# Allegro board io_4di_4aic_dbdoctor_2.brd
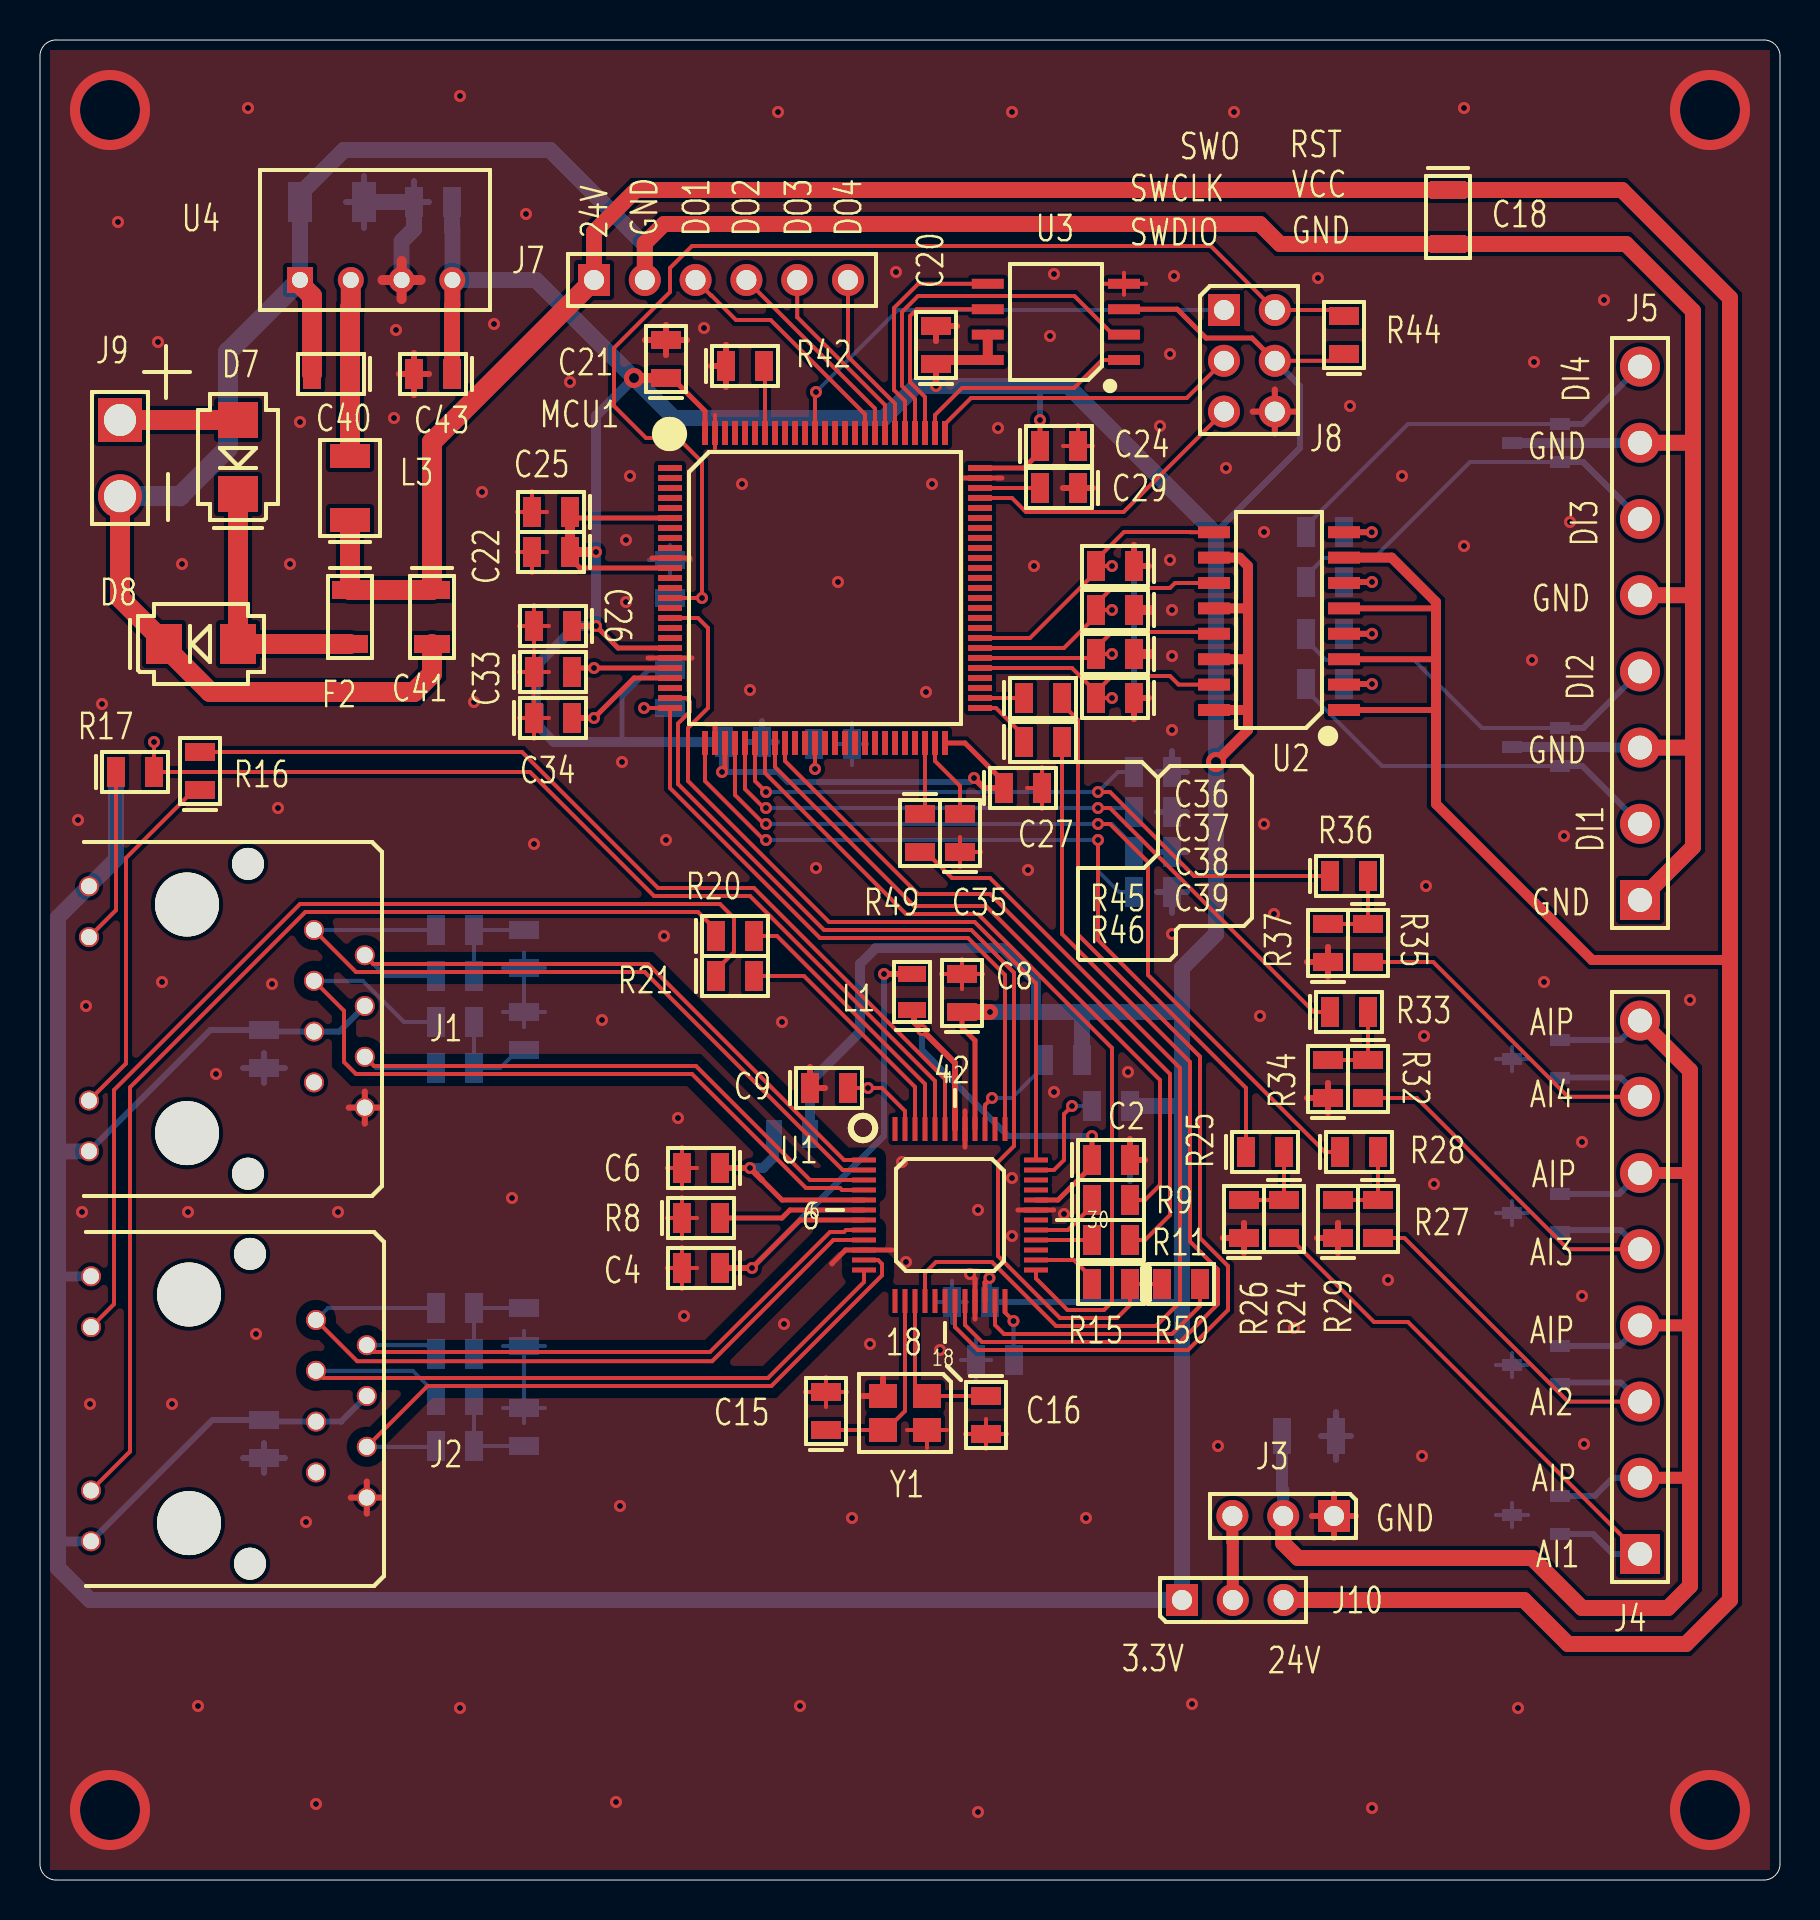
[diagram p0: board, top side]
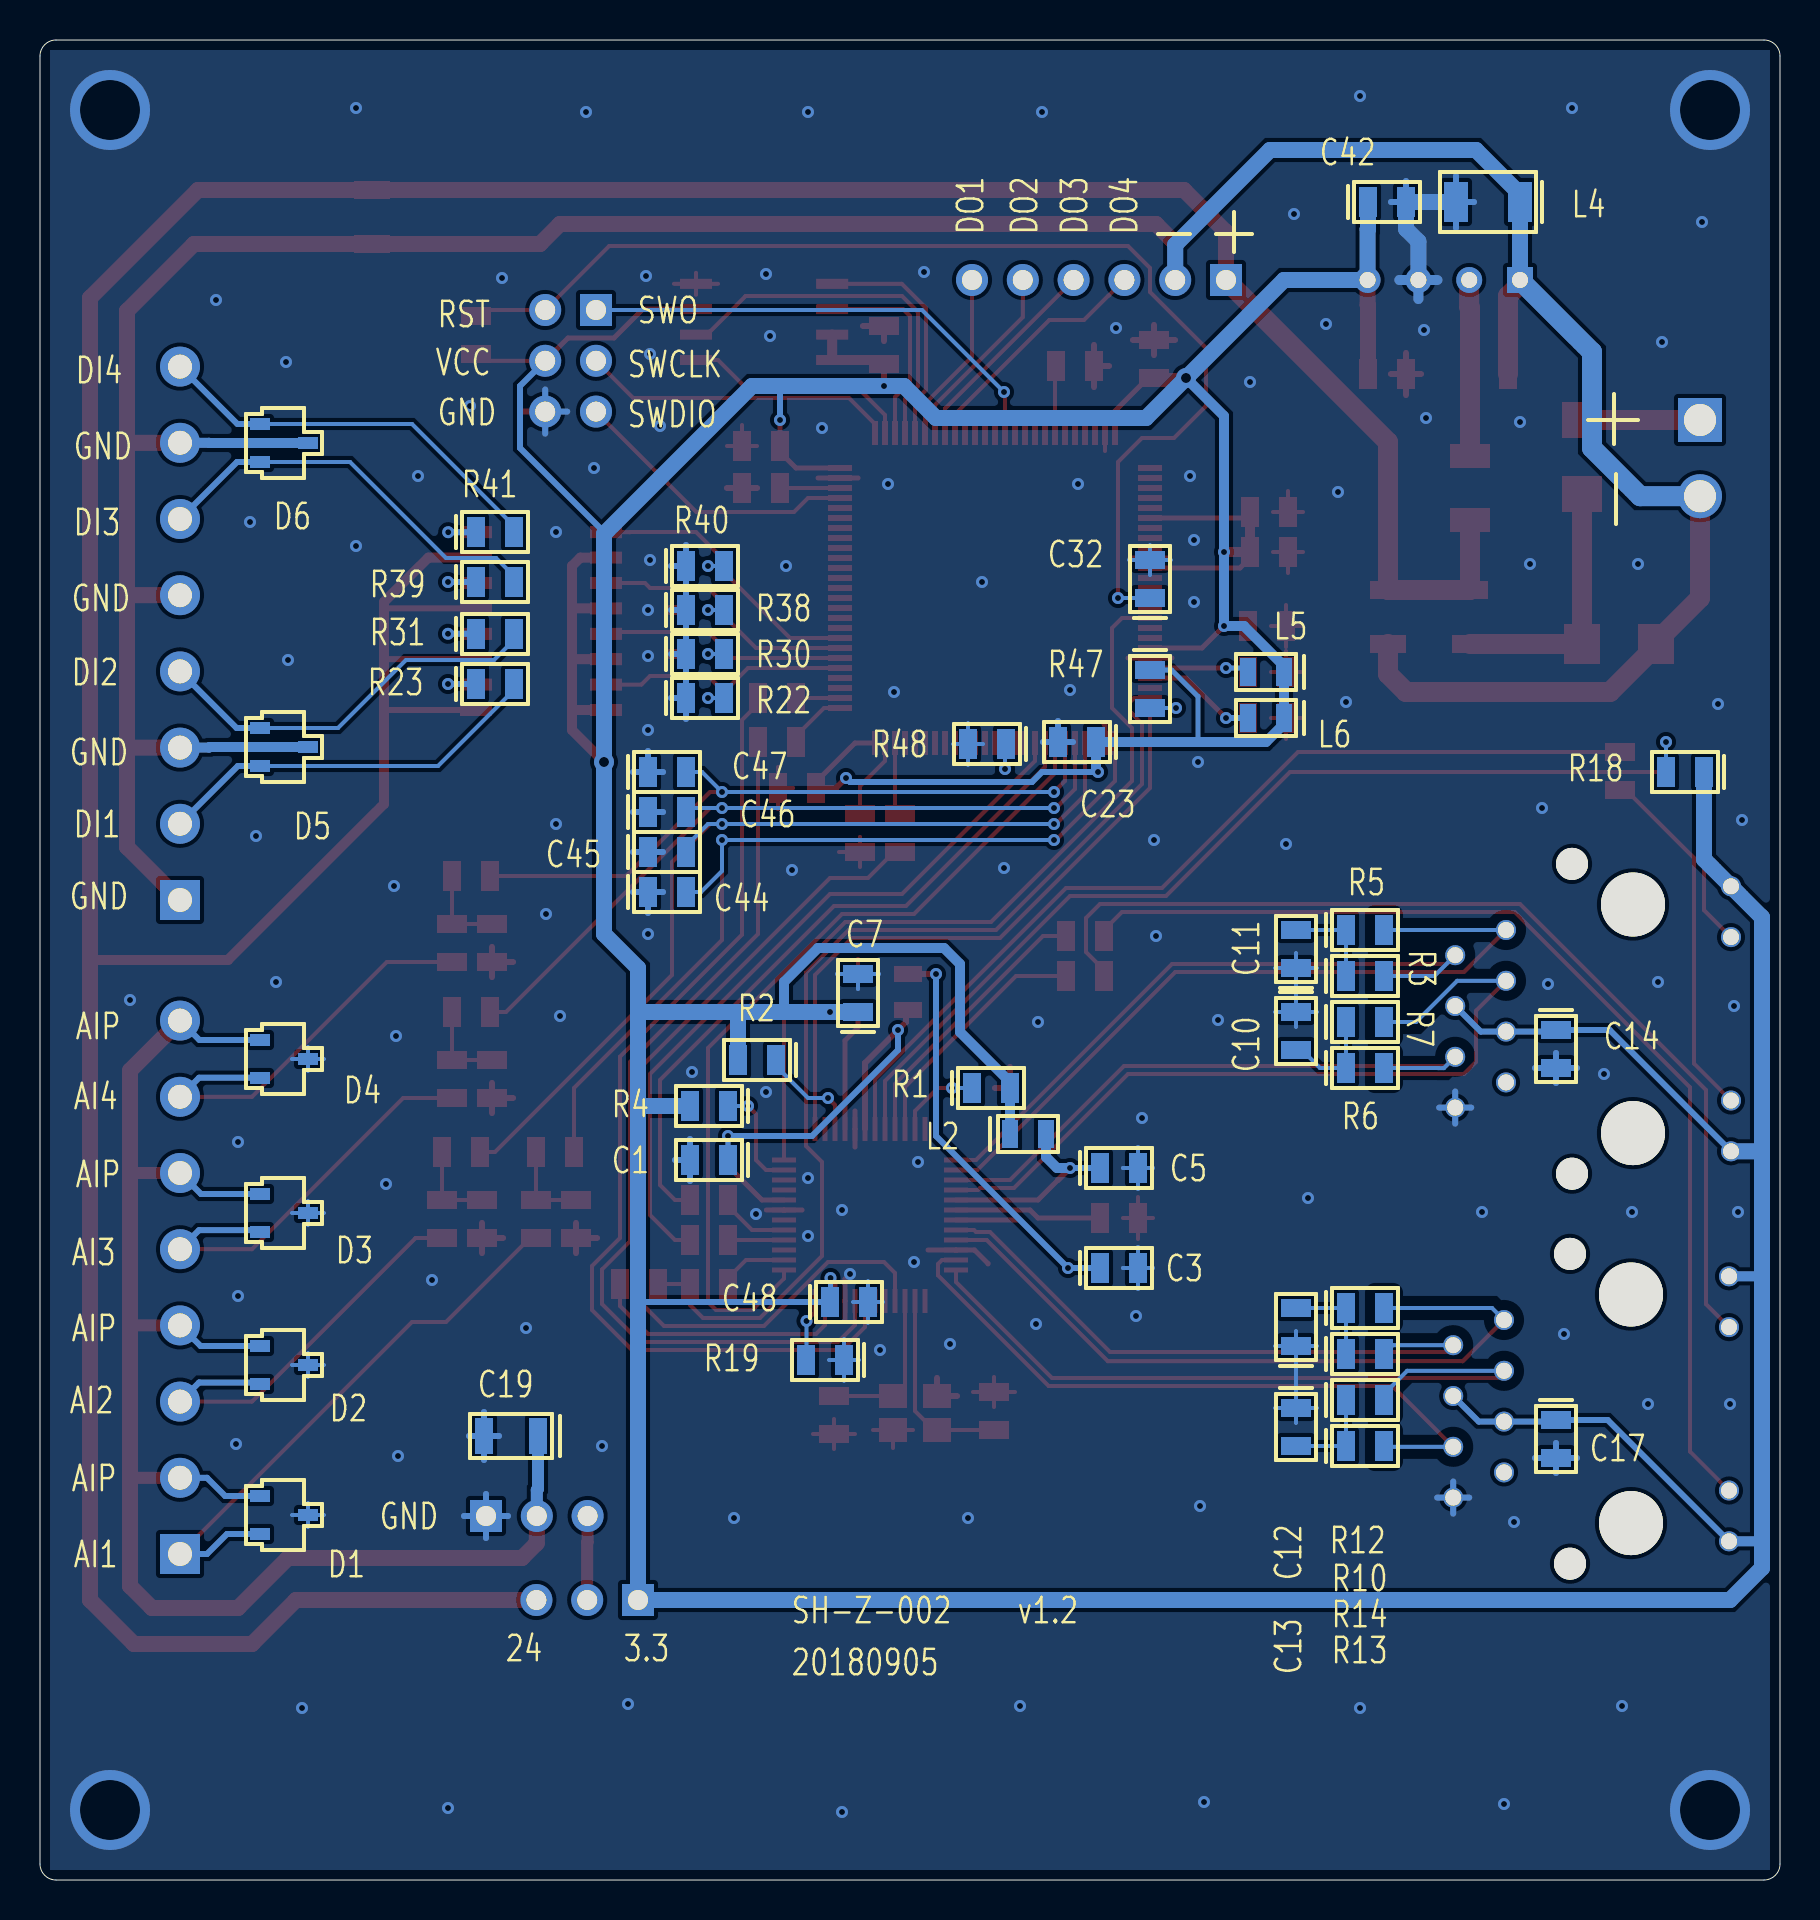
[diagram p1: board, bottom side, seen from below]

Outline 87 x 92 mm; copper layers: TOP, BOTTOM. Coordinates in mm from the lower left corner of the outline.
Outline path: 0,91.2 0,0.8 arc(0.23,0.23) 0.8,0 86.2,0 arc(86.77,0.23) 87,0.8 87,91.2 arc(86.77,91.77) 86.2,92 0.8,92 arc(0.23,91.77) 0,91.2

## Design rules (mm)
constraint set DEFAULT: pair gap 0.2
net group DP_RX1: nets RXM1 RXP1
net group DP_RX2: nets RXM2 RXP2
net group DP_TX1: nets TXM1 TXP1
net group DP_TX2: nets TXM2 TXP2

## Placement (name value [footprint] x y rotation side)
C1  47uF  [SMD_C_0805]  52.6 36 270 bottom
C2  100nF  [SMD_C_0805]  52.6 36 90 top
C3  47uF  [SMD_C_0805]  34 30.6 90 bottom
C4  100nF  [SMD_C_0805]  34 30.6 270 top
C5  47uF  [SMD_C_0805]  34 35.6 90 bottom
C6  100nF  [SMD_C_0805]  34 35.6 270 top
C7  47uF  [SMD_C_0805]  46.1 43.4 0 bottom
C8  100nF  [SMD_C_0805]  46.1 43.4 180 top
C9  100nF  [SMD_C_0805]  38.5 39.6 90 top
C10  100nF  [SMD_C_0805]  24.2 45.6 0 bottom
C11  100nF  [SMD_C_0805]  24.2 43.4 180 bottom
C12  100nF  [SMD_C_0805]  24.2 26.7 0 bottom
C13  100nF  [SMD_C_0805]  24.2 23.6 180 bottom
C14  100nF  [SMD_C_0805]  11.2 42.5 180 bottom
C15  18pF  [SMD_C_0805]  39.3 22.5 180 top
C16  18pF  [SMD_C_0805]  47.3 24.2 0 top
C17  100nF  [SMD_C_0805]  11.2 23 180 bottom
C18  10uF/50V  [SMD_C_1206]  70.4 84.5 0 top
C19  10uF/50V  [SMD_C_1206]  62.1 22.2 270 bottom
C20  100nF  [SMD_C_0805]  44.8 75.8 180 top
C21  100nF  [SMD_C_0805]  31.3 75.1 180 top
C22  100nF  [SMD_C_0805]  26.5 66.4 270 top
C23  100nF  [SMD_C_0805]  34.2 56.9 270 bottom
C24  100nF  [SMD_C_0805]  50 71.7 90 top
C25  100nF  [SMD_C_0805]  26.5 68.4 270 top
C26  100nF  [SMD_C_0805]  26.6 62.7 270 top
C27  100nF  [SMD_C_0805]  48.2 54.6 90 top
C29  10uF  [SMD_C_0805]  51.9 69.6 270 top
C32  100nF  [SMD_C_0805]  31.5 64.1 0 bottom
C33  100nF  [SMD_C_0805]  24.7 60.4 90 top
C34  100nF  [SMD_C_0805]  24.7 58.1 90 top
C35  10uF  [SMD_C_0805]  46 51.4 180 top
C36  100nF  [SMD_C_0805]  54.7 65.7 270 top
C37  100nF  [SMD_C_0805]  54.7 63.5 270 top
C38  100nF  [SMD_C_0805]  54.7 61.3 270 top
C39  100nF  [SMD_C_0805]  54.7 59.1 270 top
C40  100nF/50V  [SMD_C_0805]  15.5 75.3 270 top
C41  10uF/50V  [SMD_C_1206]  19.6 64.5 0 top
C42  47uF  [SMD_C_0805]  20.6 83.9 90 bottom
C43  47uF  [SMD_C_0805]  20.6 75.3 270 top
C44  100nF  [SMD_C_0805]  56.6 49.4 90 bottom
C45  100nF  [SMD_C_0805]  56.6 51.4 90 bottom
C46  100nF  [SMD_C_0805]  56.6 53.4 90 bottom
C47  100nF  [SMD_C_0805]  56.6 55.4 90 bottom
C48  100nF  [SMD_C_0805]  47.5 28.9 90 bottom
D1  PESD5V0L2BT  [SOT23_D]  75.9 19.2 270 bottom
D2  PESD5V0L2BT  [SOT23_D]  75.9 26.7 270 bottom
D3  PESD5V0L2BT  [SOT23_D]  75.9 34.3 270 bottom
D4  PESD5V0L2BT  [SOT23_D]  75.9 42 270 bottom
D5  NUP2105LT1G  [SOT23_D]  75.9 57.6 270 bottom
D6  NUP2105LT1G  [SOT23_D]  75.9 72.8 270 bottom
D7  1N5822  [SMAF]  9.9 69.3 180 top
D8  SMAJ24CA  [DO-214AC]  6.2 61.8 90 top
F2  500mA  [SMD_R_1206]  15.5 64.5 0 top
J1  ETH1  [RJ45_HR911105A]  13.7 47.5 90 top
J2  ETH2  [RJ45_HR911105A]  13.8 28 90 top
J3  AI_PWR_Select  [C1X3]  64.7 18.2 270 top
J4  4~20mA  [C1X8_P381]  80 16.3 180 top
J5  DI  [C1X8_P381]  80 49 180 top
J7  Relay  [C1X6]  27.7 80 90 top
J8  SWD  [C2X3]  59.2 78.5 0 top
J9  PWR  [C1X2_P381]  4 73 0 top
J10  AI_PWR_Select  [C1X3]  57.1 14 90 top
L1  bead  [SMD_L_0805]  43.6 43.5 180 top
L2  bead  [SMD_L_0805]  38.5 37.3 90 bottom
L3  6.8uH  [SMD_L_1210]  15.5 68 180 top
L4  None  [SMD_L_1210]  13 83.9 270 bottom
L5  bead  [SMD_L_0805]  24.8 60.4 270 bottom
L6  bead  [SMD_L_0805]  24.8 58.1 270 bottom
MCU1  STM32F407VET6  [LQFP100]  39.25 64.6 0 top
R1  10K  [SMD_R_0805]  40.4 39.6 90 bottom
R2  1K  [SMD_R_0805]  50.2 41 270 bottom
R3  51R  [SMD_R_0805]  21.7 45.2 90 bottom
R4  4.7K  [SMD_R_0805]  52.6 38.7 270 bottom
R5  51R  [SMD_R_0805]  21.7 47.5 90 bottom
R6  51R  [SMD_R_0805]  21.7 40.6 90 bottom
R7  51R  [SMD_R_0805]  21.7 42.9 90 bottom
R8  11.8K/1%  [SMD_R_0805]  32.1 33.1 90 top
R9  22R  [SMD_R_0805]  52.6 34 90 top
R10  51R  [SMD_R_0805]  21.7 26.3 90 bottom
R11  22R  [SMD_R_0805]  52.6 32 90 top
R12  51R  [SMD_R_0805]  21.7 28.6 90 bottom
R13  51R  [SMD_R_0805]  21.7 21.7 90 bottom
R14  51R  [SMD_R_0805]  21.7 24 90 bottom
R15  22R  [SMD_R_0805]  54.5 29.8 270 top
R16  220R  [SMD_R_0805]  8 54.5 180 top
R17  220R  [SMD_R_0805]  3.8 55.4 90 top
R18  4.7K  [SMD_R_0805]  3.8 55.4 270 bottom
R19  1K  [SMD_R_0805]  46.8 26 270 bottom
R20  220R  [SMD_R_0805]  33.8 47.2 90 top
R21  220R  [SMD_R_0805]  33.8 45.2 90 top
R22  2K  [SMD_R_0805]  54.7 59.1 90 bottom
R23  1K  [SMD_R_0805]  65.2 59.8 90 bottom
R24  51R  [SMD_R_0805]  62.2 34 0 top
R25  2K  [SMD_R_0805]  60.3 36.4 90 top
R26  100R  [SMD_R_0805]  60.2 32.1 180 top
R27  51R  [SMD_R_0805]  66.9 34 0 top
R28  2K  [SMD_R_0805]  65 36.4 90 top
R29  100R  [SMD_R_0805]  64.9 32.1 180 top
R30  2K  [SMD_R_0805]  54.7 61.3 90 bottom
R31  1K  [SMD_R_0805]  65.2 62.3 90 bottom
R32  51R  [SMD_R_0805]  66.4 41 0 top
R33  2K  [SMD_R_0805]  64.5 43.4 90 top
R34  100R  [SMD_R_0805]  64.4 39.1 180 top
R35  51R  [SMD_R_0805]  66.4 47.8 0 top
R36  2K  [SMD_R_0805]  64.5 50.2 90 top
R37  100R  [SMD_R_0805]  64.4 45.9 180 top
R38  2K  [SMD_R_0805]  54.7 63.5 90 bottom
R39  1K  [SMD_R_0805]  65.2 64.9 90 bottom
R40  2K  [SMD_R_0805]  54.7 65.7 90 bottom
R41  1K  [SMD_R_0805]  65.2 67.4 90 bottom
R42  10K  [SMD_R_0805]  34.3 75.7 90 top
R44  10K  [SMD_R_0805]  65.2 76.3 180 top
R45  22R  [SMD_R_0805]  49.2 59.1 90 top
R46  22R  [SMD_R_0805]  49.2 56.9 90 top
R47  1.5K  [SMD_R_0805]  31.5 60.5 180 bottom
R48  10K  [SMD_R_0805]  38.7 56.8 270 bottom
R49  22R  [SMD_R_0805]  44 53.3 0 top
R50  22R  [SMD_R_0805]  56.1 29.8 90 top
U1  KSZ8863RLL  [LQFP48]  45.5 33.25 0 top
U2  PS2801-4/SM  [SOP16]  65.2 58.5 180 top
U3  W25Q64  [SOIC8_208MIL]  53.8 76 180 top
U4  B2403  [B2403S]  13 80 0 top
Y1  25M  [SMD3225_CRYSTAL]  44.35 24.2 180 top

## Library data of the parts
C1-C27 C29 C32-C48 = CAP NP
D1-D6 = SM712
D7 = DIODE
D8 = DIODE BI-DIR TRIG
F2 = FUSE
J1 J2 = RJ45_HR911105A
J3 J10 = C1X3
J4 J5 = C1X8Gen
J7 = C1X6Gen
J8 = C2X3
J9 = C1X2
L1-L6 = INDUCTOR
MCU1 = STM32F407VET
R1-R42 R44-R50 = RESISTOR
U1 = KSZ8863RLL
U2 = PS2801-4/SM
U3 = GD25Q64C
U4 = B2403S
Y1 = crystal-4pin_1

## Footprints (pads in the part's own frame, mm; a bottom-side part is the same pattern mirrored in y, then rotated)
B2403S
  rect 1.3x1.3 hole 0.8: 1(0,0)
  round 1.3 hole 0.8: 2(2.54,0) 3(5.08,0) 4(7.62,0)
C1X2_P381
  rect 2.2x2.2 hole 1.6: 1(0,0)
  round 2.2 hole 1.6: 2(0,-3.81)
C1X3
  rect 1.6x1.6 hole 1: 1(0,0)
  round 1.6 hole 1: 2(0,-2.54) 3(0,-5.08)
C1X6
  rect 1.6x1.6 hole 1: 1(0,0)
  round 1.6 hole 1: 2(0,-2.54) 3(0,-5.08) 4(0,-7.62) 5(0,-10.16) 6(0,-12.7)
C1X8_P381
  rect 2x2 hole 1.2: 1(0,0)
  round 2 hole 1.2: 2(0,-3.81) 3(0,-7.62) 4(0,-11.43) 5(0,-15.24) 6(0,-19.05) 7(0,-22.86) 8(0,-26.67)
C2X3
  rect 1.6x1.6 hole 1: 1(0,0)
  round 1.6 hole 1: 2(0,-2.54) 3(0,-5.08) 4(2.54,-5.08) 5(2.54,-2.54) 6(2.54,0)
DO-214AC
  rect 2x1.8 smd: 1(0,0) 2(0,-3.7)
LQFP48
  rect 1.2x0.25 smd: 1(-4.3,2.75) 2(-4.3,2.25) 3(-4.3,1.75) 4(-4.3,1.25) 5(-4.3,0.75) 6(-4.3,0.25) 7(-4.3,-0.25) 8(-4.3,-0.75) 9(-4.3,-1.25) 10(-4.3,-1.75) 11(-4.3,-2.25) 12(-4.3,-2.75) 25(4.3,-2.75) 26(4.3,-2.25) 27(4.3,-1.75) 28(4.3,-1.25) 29(4.3,-0.75) 30(4.3,-0.25) 31(4.3,0.25) 32(4.3,0.75) 33(4.3,1.25) 34(4.3,1.75) 35(4.3,2.25) 36(4.3,2.75)
  rect 0.25x1.2 smd: 13(-2.75,-4.3) 14(-2.25,-4.3) 15(-1.75,-4.3) 16(-1.25,-4.3) 17(-0.75,-4.3) 18(-0.25,-4.3) 19(0.25,-4.3) 20(0.75,-4.3) 21(1.25,-4.3) 22(1.75,-4.3) 23(2.25,-4.3) 24(2.75,-4.3) 37(2.75,4.3) 38(2.25,4.3) 39(1.75,4.3) 40(1.25,4.3) 41(0.75,4.3) 42(0.25,4.3) 43(-0.25,4.3) 44(-0.75,4.3) 45(-1.25,4.3) 46(-1.75,4.3) 47(-2.25,4.3) 48(-2.75,4.3)
LQFP100
  rect 1.2x0.3 smd: 1(-7.75,6) 2(-7.75,5.5) 3(-7.75,5) 4(-7.75,4.5) 5(-7.75,4) 6(-7.75,3.5) 7(-7.75,3) 8(-7.75,2.5) 9(-7.75,2) 10(-7.75,1.5) 11(-7.75,1) 12(-7.75,0.5) 13(-7.75,0) 14(-7.75,-0.5) 15(-7.75,-1) 16(-7.75,-1.5) 17(-7.75,-2) 18(-7.75,-2.5) 19(-7.75,-3) 20(-7.75,-3.5) 21(-7.75,-4) 22(-7.75,-4.5) 23(-7.75,-5) 24(-7.75,-5.5) 25(-7.75,-6) 51(7.75,-6) 52(7.75,-5.5) 53(7.75,-5) 54(7.75,-4.5) 55(7.75,-4) 56(7.75,-3.5) 57(7.75,-3) 58(7.75,-2.5) 59(7.75,-2) 60(7.75,-1.5) 61(7.75,-1) 62(7.75,-0.5) 63(7.75,0) 64(7.75,0.5) 65(7.75,1) 66(7.75,1.5) 67(7.75,2) 68(7.75,2.5) 69(7.75,3) 70(7.75,3.5) 71(7.75,4) 72(7.75,4.5) 73(7.75,5) 74(7.75,5.5) 75(7.75,6)
  rect 0.3x1.2 smd: 26(-6,-7.75) 27(-5.5,-7.75) 28(-5,-7.75) 29(-4.5,-7.75) 30(-4,-7.75) 31(-3.5,-7.75) 32(-3,-7.75) 33(-2.5,-7.75) 34(-2,-7.75) 35(-1.5,-7.75) 36(-1,-7.75) 37(-0.5,-7.75) 38(0,-7.75) 39(0.5,-7.75) 40(1,-7.75) 41(1.5,-7.75) 42(2,-7.75) 43(2.5,-7.75) 44(3,-7.75) 45(3.5,-7.75) 46(4,-7.75) 47(4.5,-7.75) 48(5,-7.75) 49(5.5,-7.75) 50(6,-7.75) 76(6,7.75) 77(5.5,7.75) 78(5,7.75) 79(4.5,7.75) 80(4,7.75) 81(3.5,7.75) 82(3,7.75) 83(2.5,7.75) 84(2,7.75) 85(1.5,7.75) 86(1,7.75) 87(0.5,7.75) 88(0,7.75) 89(-0.5,7.75) 90(-1,7.75) 91(-1.5,7.75) 92(-2,7.75) 93(-2.5,7.75) 94(-3,7.75) 95(-3.5,7.75) 96(-4,7.75) 97(-4.5,7.75) 98(-5,7.75) 99(-5.5,7.75) 100(-6,7.75)
RJ45_HR911105A
  round 1.6 hole 1.6 unplated: (-12.185,3.3) (3.305,3.3)
  round 3.2 hole 3.2 unplated: (-10.155,6.35) (1.275,6.35)
  round 1 hole 0.8: 1(0,0) 2(-1.26,-2.54) 3(-2.54,0) 4(-3.8,-2.54) 5(-5.08,0) 6(-6.34,-2.54) 7(-7.62,0) 8(-8.88,-2.54) 9(2.185,11.25) 10(-0.355,11.25) 11(-8.525,11.25) 12(-11.065,11.25)
SMAF
  rect 2x1.8 smd: 1(0,0) 2(0,-3.7)
SMD3225_CRYSTAL
  rect 1.4x1.2 smd: 1(0,0) 2(2.2,0) 3(2.2,1.7) 4(0,1.7)
SMD_C_0805
  rect 1.5x0.9 smd: 1(0,0) 2(0,-1.9)
SMD_C_1206
  rect 1.8x0.9 smd: 1(0,0) 2(0,-2.7)
SMD_L_0805
  rect 1.4x0.8 smd: 1(0,0) 2(0,-1.8)
SMD_L_1210
  rect 2x1.2 smd: 1(0,0) 2(0,-3.2)
SMD_R_0805
  rect 1.5x0.9 smd: 1(0,0) 2(0,-1.9)
SMD_R_1206
  rect 1.8x0.9 smd: 1(0,0) 2(0,-2.7)
SOIC8_208MIL
  rect 1.6x0.5 smd: 1(-0.4,0) 2(-0.4,-1.27) 3(-0.4,-2.54) 4(-0.4,-3.81) 5(6.41,-3.81) 6(6.41,-2.54) 7(6.41,-1.27) 8(6.41,0)
SOP16
  rect 1.6x0.6 smd: 1(0,0) 2(0,-1.27) 3(0,-2.54) 4(0,-3.81) 5(0,-5.08) 6(0,-6.35) 7(0,-7.62) 8(0,-8.89) 9(6.5,-8.89) 10(6.5,-7.62) 11(6.5,-6.35) 12(6.5,-5.08) 13(6.5,-3.81) 14(6.5,-2.54) 15(6.5,-1.27) 16(6.5,0)
SOT23_D
  rect 0.6x1 smd: 1(0,-0.1) 2(1.9,-0.1) 3(0.95,2.3)

## Nets
1.8V: C1.1 C2.1 L1.1 U1.32 U1.42
3.3V: C7.1 C8.1 C14.1 C17.1 C20.1 C21.1 C22.1 C23.1 C24.1 C25.1 C26.1 C27.1 C42.1 C43.1 C48.1 J1.4 J1.5 J1.9 J1.12 J2.4 J2.5 J2.9 J2.12 J8.5 J10.1 L2.1 L5.1 L6.1 MCU1.6 MCU1.11 MCU1.19 MCU1.28 MCU1.50 MCU1.75 MCU1.100 R1.2 R2.2 R4.2 R18.1 R44.1 R47.1 U1.22 U1.40 U2.10 U2.12 U2.14 U2.16 U3.3(WP#) U3.7 U3.8 U4.4
24V: C18.1 C41.1 F2.1 J7.1 J10.3(C) L3.1 U2.1 U2.3 U2.5 U2.7
GND: C1.2 C2.2 C3.2 C4.2 C5.2 C6.2 C7.2 C8.2 C9.1 C10.1 C11.1 C12.1 C13.1 C14.2 C15.2 C16.2 C17.2 C19.2 C20.2 C21.2 C22.2 C23.2 C24.2 C25.2 C26.2 C27.2 C29.1 C32.2 C33.1 C34.1 C35.1 C36.1 C37.1 C38.1 C39.1 C42.2 C43.2 C44.1 C45.1 C46.1 C47.1 C48.2 D1.3 D2.3 D3.3 D4.3 J1.8 J2.8 J3.1 J8.4 L4.2 MCU1.10 MCU1.20(VSSA) MCU1.27 MCU1.74 MCU1.99 R8.1 R19.1 R22.1 R26.1 R29.1 R30.1 R34.1 R37.1 R38.1 R40.1 R42.1 R48.2 U1.10 U1.21 U1.31 U1.41 U3.4 U4.3 Y1.2 Y1.4(GND#4)
GND_EXT: C18.2 C40.2 C41.2 D5.3 D6.3 D8.1 J5.1 J5.3 J5.5 J5.7 J7.2 J9.2 L4.1 U4.1
VDDA: C34.2 L6.2 MCU1.22
VDDA_1.8: C3.1 C4.1 L1.2 U1.7
VDDA_3.3: C5.1 C6.1 L2.2 U1.5
AI_C_0: D1.2(IO#2) J4.1 R24.2
AI_C_0_CH_3: C44.2 MCU1.26 R25.1
AI_C_1: D2.2(IO#2) J4.3 R27.2
AI_C_1_CH_4: C45.2 MCU1.29 R28.1
AI_C_2: D3.2(IO#2) J4.5 R32.2
AI_C_2_CH_5: C46.2 MCU1.30 R33.1
AI_C_3: D4.2(IO#2) J4.7 R35.2
AI_C_3_CH_6: C47.2 MCU1.31 R36.1
AI_OUT_PWR: J3.3(C) J10.2
AI_PWR_OUT: C19.1 D1.1 D2.1 D3.1 D4.1 J3.2 J4.2 J4.4 J4.6 J4.8
DI_IN_0: D5.2(IO#2) J5.2 R23.2
DI_IN_1: D5.1 J5.4 R31.2
DI_IN_2: D6.2(IO#2) J5.6 R39.2
DI_IN_3: D6.1 J5.8 R41.2
DI_TTL_0: C39.2 MCU1.55 R22.2 U2.15
DI_TTL_1: C38.2 MCU1.56 R30.2 U2.13
DI_TTL_2: C37.2 MCU1.57 R38.2 U2.11
DI_TTL_3: C36.2 MCU1.58 R40.2 U2.9(EMITTER)
ETH1_LED0: R17.2 R18.2 U1.44
ETH1_LED1: R16.2 U1.43
ETH2_LED0: R21.2 U1.46
ETH2_LED1: R20.2 U1.45
ETH_CRS_DV: MCU1.32 U1.25
ETH_MDC: MCU1.16 U1.36
ETH_MDIO: MCU1.25 R47.2 U1.37
ETH_REF_CLK: MCU1.24 R15.1 R50.1
ETH_RXD0: MCU1.33 R9.2
ETH_RXD1: MCU1.34 R11.2
ETH_TX_EN: R49.2 U1.16
ETH_TXD0: R46.2 U1.20
ETH_TXD1: R45.2 U1.19
FLASH_CS: MCU1.77 U3.1
FLASH_MISO: MCU1.79 U3.2
FLASH_MOSI: MCU1.80 U3.5
FLASH_SCK: MCU1.78 U3.6
RELAY_0: J7.6 MCU1.81
RELAY_1: J7.5 MCU1.82
RELAY_2: J7.4 MCU1.83
RELAY_3: J7.3 MCU1.84
RST: C32.1 J8.6 MCU1.14 R44.2
RXM1: J1.2 R3.2 U1.1
RXM2: J2.2 R10.2 U1.8
RXP1: J1.1(TXP) R5.2 U1.2
RXP2: J2.1(TXP) R12.2 U1.9
SWCLK: J8.2 MCU1.76
SWDIO: J8.3 MCU1.72
SWO: J8.1 MCU1.89
TXM1: J1.6 R6.2 U1.3
TXM2: J2.6 R13.2 U1.11
TXP1: J1.3 R7.2 U1.4
TXP2: J2.3 R14.2 U1.12
VREF: C33.2 L5.2 MCU1.21
N3761335: R24.1 R25.2 R26.2
N3761583: R27.1 R28.2 R29.2
N3788396: MCU1.94 R42.2
N3788604: C29.2 MCU1.73
N3788651: C35.2 MCU1.49
N3789744: R32.1 R33.2 R34.2
N3789822: R35.1 R36.2 R37.2
N3796397: MCU1.37 R48.1
N3796963: MCU1.48 R49.1
N4537878: R23.1 U2.2
N4538644: R31.1 U2.4
N4538843: R41.1 U2.8
N4539052: R39.1 U2.6
N4547709: MCU1.51 R46.1
N4547713: MCU1.52 R45.1
N4548481: R8.2 U1.6
N4551709: C15.1 U1.14 Y1.3
N4551769: C16.1 U1.15(X2) Y1.1
N4553149: R19.2 U1.24
N4554278: R4.1 U1.35
N4554434: R2.1 U1.39
N4554520: C10.2 R3.1 R5.1
N4554841: C11.2 R6.1 R7.1
N4555040: C12.2 R10.1 R12.1
N4555226: C13.2 R13.1 R14.1
N4558201: C9.2 R1.1 U1.47
N4585606: R15.2 U1.26
N4585853: R9.1 U1.29
N4585857: R11.1 U1.28
N4589372: J1.10 R17.1
N4589863: J1.11 R16.1
N4590672: J2.11 R20.1
N4590712: J2.10 R21.1
N4616330: R50.2 U1.23
N4623177: D7.2 J9.1
N4623416: D7.1(K) D8.2 F2.2
N4630323: C40.1 L3.2 U4.2(VIN)

Pads without a net: J1 7; J2 7; MCU1 1 2 3 4 5 7 8 9 12 13 15 17 18 23 35 36 38 39 40 41 42 43 44 45 46 47 53 54 59 60 61 62 63 64 65 66 67 68 69 70 71 85 86 87 88 90 91 92 93 95 96 97 98; U1 13 17 18 27 30 33 34 38 48

## Via types
v1: diameter 0.6, hole 0.3, TOP to BOTTOM, 155 vias
v2: diameter 1, hole 0.5, TOP to BOTTOM, 2 vias
v3: diameter 4, hole 3, TOP to BOTTOM, 4 vias

## Routing (per net, layer and track width the routed paths; a pad name or vN(x,y) marks a point on that pad's centre or on a via; arc(x,y) is an arc through that point)
1.8V: length 24.3
  TOP w0.25: v1(52.6,37.2) C2.1 52.6,35.7 50.9,34 U1.32
  TOP w0.3: L1.1 43.7,43.4 43.7,42.9 v1(44.1,42.5) 45.75,40.85 U1.42
  BOTTOM w0.25: v1(52.6,37.2) C2.1
  BOTTOM w0.3: v1(52.6,37.2) 48.4,37.2 44.1,41.5 v1(44.1,42.5)
3.3V: length 433.9
  TOP w0.2: R44.1 64.86,75.96 J8.5
  TOP w0.25: v1(50,73) C24.1 50,71.4 49.2,70.6 MCU1.75 ; U1.22 47.25,29.88 v1(47.47,30.1) ; 26.5,68.3 26.7,68.1 MCU1.6 ; MCU1.50 46.25,56.85 48.2,54.9 C27.1 ; v1(34.1,55.4) 34.25,55.55 MCU1.28 ; U3.3 56.86,78.54 58.3,77.1 60.6,77.1 J8.5 ; MCU1.100 33.25,73.45 31.6,75.1 C21.1 ; v1(27.8,62.7) 28.9,61.6 MCU1.19 ; C8.1 46.1,42.62 46.75,41.97 U1.40 ; C22.1 26.5,66.1 27,65.6 MCU1.11
  TOP w0.3: C27.1 47.2,54.6 v1(46.7,55.1) ; v1(44.8,74.7) C20.1 44.8,76 ; v1(27.8,62.7) C26.1
  TOP w0.5: 60.4,58.5 60.4,61 ; 60.4,58.5 60.4,57.5 v2(58.8,55.9) ; 60.4,58.5 U2.16 ; 60.4,61 60.4,63.6 ; 60.4,61 60.36,61.04 U2.14 ; 60.4,63.6 60.4,65.7 59.98,66.12 U2.10 ; 60.4,63.6 60.38,63.58 U2.12 ; v1(27.8,66.4) C22.1 C25.1 ; 44.8,76 U3.8 U3.7 ; v2(29.7,75.1) C21.1
  TOP w0.8: v1(47.5,43.4) C8.1 ; U4.4 20.62,78.75 20.6,78.73 C43.1
  BOTTOM w0.25: 29.1,56.9 29.1,59.18 30.42,60.5 R47.1 ; C48.1 47.47,28.93 v1(47.47,30.1)
  BOTTOM w0.3: 57.1,28.8 57,28.9 C48.1 ; J1.12 8.52,42.5 C14.1 11.28,42.42 J1.5 14.96,42.42 J1.4 ; J2.12 8.62,23 C17.1 11.28,22.92 J2.5 15.06,22.92 J2.4 ; v1(50,73) 50,74.7 ; v1(34.1,55.4) 36.9,55.4 37.4,54.9 46.5,54.9 v1(46.7,55.1) ; 58.75,67.35 63,71.6 63,74.7 J8.5
  BOTTOM w0.5: J2.12 0.94,16.93 0.9,16.9 ; v2(29.7,75.1) 27.8,73.2 v1(27.8,66.4) v1(27.8,62.7) 26.8,62.7 24.8,60.7 L5.1 L6.1 24.8,57.8 25.7,56.9 C23.1 34.2,55.5 v1(34.1,55.4) ; 0.9,30.2 0.92,30.18 J2.9 ; L2.1 R1.2 38.5,39.9 41,42.4 41,45.8 41.8,46.6 48.1,46.6 49.8,44.9 49.8,43.4
  BOTTOM w0.8: 52.1,43.4 v1(47.5,43.4) C8.1 ; 52.1,43.4 57.1,43.4 ; 52.1,43.4 R2.2 ; U4.4 20.62,82.53 20.6,82.55 C42.1 ; U4.4 24.8,80 v2(29.7,75.1) 31.7,73.1 42.2,73.1 43.8,74.7 v1(44.8,74.7) 51.4,74.7 58.8,67.3 v2(58.8,55.9) 58.8,47.3 57.1,45.6 57.1,43.4 ; U4.4 20.6,79.98 ; 57.1,43.4 57.1,38.7 ; R4.2 57.1,38.7 ; 57.1,38.7 J10.1 2.5,14 0.9,15.6 0.9,36.4 ; 0.9,36.4 0.94,36.44 J1.12 ; 0.9,36.4 0.9,48.13 J1.9 3.8,51.03 R18.1
24V: length 225.4
  TOP w0.3: U2.3 69.76,61.04 69.8,61 ; 69.8,63.6 69.78,63.58 U2.5 ; U2.1 69.8,58.5
  TOP w0.5: 84.5,46 77.6,46 69.8,53.8 69.8,63.9 67.58,66.12 U2.7
  TOP w0.8: J7.1 27.7,82.4 29.8,84.5 C18.1 79.1,84.5 84.5,79.1 84.5,14 82.3,11.8 76.4,11.8 74.2,14 J10.3
  TOP w1: L3.1 F2.1 C41.1 19.6,71.9 J7.1
GND: length 241.1
  TOP w0.2: 23.95,62.7 C26.2 ; C26.2 24.7,63.75 ; C26.2 25.45,62.7 ; C26.2 24.7,61.65 ; C35.1 47.05,51.4 ; C35.1 46,52.15 ; C35.1 46,50.65 ; 53.1,79.81 U3.4 ; U3.4 54.2,79.26 ; U3.4 55.3,79.81 ; U3.4 54.2,80.36 ; C16.2 48.35,22.3 ; C16.2 46.25,22.3 ; C16.2 47.3,23.05 ; C16.2 47.3,21.55 ; 23.95,58.1 C34.1 ; C34.1 25.45,58.1 ; C34.1 24.7,59.15 ; C34.1 24.7,57.05 ; 31.35,35.6 C6.2 ; C6.2 32.1,36.65 ; C6.2 32.1,34.55 ; C6.2 32.85,35.6 ; 23.85,68.4 C25.2 ; C25.2 24.6,69.45 ; C25.2 25.35,68.4 ; C8.2 47.15,45.3 ; C8.2 46.1,46.05 ; C8.2 45.05,45.3 ; C8.2 46.1,44.55 ; C22.2 25.35,66.4 ; C22.2 24.6,65.35 ; C22.2 23.85,66.4 ; C4.2 32.85,30.6 ; C4.2 32.1,29.55 ; C4.2 31.35,30.6 ; C4.2 32.1,31.65 ; 33.75,71.45 MCU1.99 33.75,73.25 ; 24.7,59.35 C33.1 ; C33.1 23.95,60.4 ; C33.1 25.45,60.4 ; C33.1 24.7,61.45 ; 31.35,33.1 R8.1 ; R8.1 32.85,33.1 ; R8.1 32.1,32.05 ; R8.1 32.1,34.15 ; C24.2 51.9,72.75 ; C24.2 52.65,71.7 ; C24.2 51.15,71.7 ; C15.2 39.3,25.15 ; C15.2 39.3,23.65 ; C15.2 38.25,24.4 ; C15.2 40.35,24.4 ; 43.35,22.5 Y1.4 ; Y1.4 44.35,21.6 ; Y1.4 45.35,22.5 ; 50.7,33.5 50.67,33.5 ; 50.1,53.55 C27.2 ; C27.2 50.1,55.65 ; C27.2 49.35,54.6
  TOP w0.25: 39.6,30.8 39.6,30.83 40.27,31.5 U1.10 42.6,31.5 ; MCU1.27 33.75,57.75 33.8,57.8 ; 32.6,61.1 MCU1.20 30.4,61.1 ; 30.6,66.1 MCU1.10 32.5,66.1 ; 50.67,33.5 U1.31 48.9,33.5 ; 46.1,70.1 MCU1.74 48.1,70.1 ; 46.25,38.45 U1.41 46.25,36.65 ; 46.75,28.05 U1.21 46.75,30.05 v1(46.5,30.3)
  TOP w0.3: 52.65,69.6 C29.1 51.15,69.6 ; 34.3,76.75 R42.1 ; R42.1 34.3,74.65 ; R42.1 33.55,75.7 ; 17.14,19.12 J2.8 ; J2.8 16.34,19.92 ; J2.8 16.34,18.32 ; J2.8 15.54,19.12 ; 41.15,24.2 Y1.2 42.15,25.1 ; R37.1 64.4,45.15 ; R37.1 63.35,45.9 ; R37.1 64.4,46.65 ; R34.1 64.4,38.35 ; R34.1 64.4,39.85 ; R34.1 63.35,39.1 ; 44.8,76.95 C20.2 45.85,77.7 ; C43.2 19.45,75.3 ; C43.2 17.95,75.3 ; C43.2 18.7,76.35 ; C43.2 18.7,74.25 ; J8.4 62.84,73.42 ; J8.4 61.74,72.32 ; J8.4 61.74,74.52 ; J8.4 60.64,73.42 ; C21.2 31.3,77.75 ; C21.2 32.35,77 ; C21.2 30.25,77 ; C21.2 31.3,76.25 ; 39.25,39.6 C9.1 38.5,40.65 ; 54.5,37.05 C2.2 55.25,36 ; J1.8 16.24,37.82 ; J1.8 16.24,39.42 ; J1.8 17.04,38.62 ; J1.8 15.44,38.62 ; R26.1 60.2,31.35 ; R26.1 60.2,32.85 ; R26.1 59.15,32.1 ; J3.1 64.7,19.3 ; J3.1 63.6,18.2 ; J3.1 65.8,18.2 ; J3.1 64.7,17.1 ; R29.1 64.9,31.35 ; R29.1 64.9,32.85 ; R29.1 63.85,32.1 ; 54.7,66.75 C36.1 55.45,65.7 ; 54.7,58.05 C39.1 55.45,59.1
  TOP w0.5: U4.3 18.08,79.05 ; U4.3 19.03,80 ; U4.3 18.08,80.95 ; U4.3 17.13,80 ; C38.1 55.5,61.3 ; C37.1 55.5,63.5
  BOTTOM w0.2: 73.6,25.15 D2.3 ; D2.3 72.8,25.75 ; D2.3 73.6,26.35 ; D2.3 74.4,25.75 ; 32.1,29.55 C4.2 ; C4.2 32.1,31.65 ; C4.2 32.85,30.6 ; C4.2 31.35,30.6 ; 31.5,65.25 C32.2 ; C32.2 31.5,66.75 ; C32.2 32.55,66 ; C32.2 30.45,66 ; C13.1 25.25,23.6 ; C13.1 C12.1 ; C13.1 24.2,22.85 ; C13.1 23.15,23.6 ; 39.85,56.8 R48.2 ; R48.2 40.6,57.85 ; R48.2 41.35,56.8 ; R48.2 40.6,55.75 ; 23.15,45.6 C10.1 ; C10.1 24.2,46.35 ; C10.1 25.25,45.6 ; C10.1 C11.1 ; 23.15,26.7 C12.1 ; C12.1 24.2,27.45 ; C12.1 25.25,26.7 ; 46.8,24.95 R19.1 ; R19.1 47.55,26 ; R19.1 46.8,27.05 ; R19.1 46.05,26 ; C11.1 25.25,43.4 ; C11.1 24.2,42.65 ; C11.1 23.15,43.4 ; D3.3 73.6,33.95 ; D3.3 74.4,33.35 ; D3.3 73.6,32.75 ; D3.3 72.8,33.35 ; D1.3 73.6,18.85 ; D1.3 74.4,18.25 ; D1.3 72.8,18.25 ; D1.3 73.6,17.65 ; C8.2 47.15,45.3 ; C8.2 45.05,45.3 ; C8.2 46.1,44.55 ; 45.6,27.85 C48.2 ; C48.2 44.85,28.9 ; C48.2 46.35,28.9 ; C48.2 45.6,29.95 ; 72.8,41.05 D4.3 ; D4.3 73.6,40.45 ; D4.3 74.4,41.05 ; D4.3 73.6,41.65 ; C6.2 32.1,36.65 ; C6.2 31.35,35.6 ; C6.2 32.85,35.6 ; C6.2 32.1,34.55
  BOTTOM w0.3: L4.2 16.2,82.6 ; L4.2 16.2,85.2 ; L4.2 15.3,83.9 ; C19.2 64.8,23.4 ; C19.2 64.05,22.2 ; C19.2 65.55,22.2 ; C19.2 64.8,21 ; 57.35,53.4 C46.1 55.85,53.4 ; C14.2 12.25,40.6 ; C14.2 10.15,40.6 ; C14.2 11.2,39.85 ; C14.2 11.2,41.35 ; 16.24,39.42 J1.8 ; J1.8 15.44,38.62 ; J1.8 17.04,38.62 ; J1.8 16.24,37.82 ; C23.2 36.85,56.9 ; C23.2 36.1,57.95 ; C23.2 35.35,56.9 ; 56.6,56.45 C47.1 ; C47.1 55.85,55.4 ; C47.1 57.35,55.4 ; 55.45,63.5 C37.1 ; C37.1 C38.1 ; C37.1 C36.1 ; 55.85,49.4 C44.1 ; C44.1 56.6,48.35 ; C44.1 57.35,49.4 ; J3.1 65.8,18.2 ; J3.1 64.7,19.3 ; J3.1 64.7,17.1 ; J3.1 63.6,18.2 ; 19.45,83.9 C42.2 18.7,84.95 ; 54.5,34.95 C2.2 ; C2.2 55.25,36 ; C2.2 54.5,37.05 ; 57.35,51.4 C45.1 55.85,51.4 ; C39.1 54.7,58.05 ; C39.1 C38.1 ; C39.1 55.45,59.1 ; C36.1 54.7,66.75 ; C36.1 55.45,65.7 ; 10.15,21.1 C17.2 ; C17.2 11.2,21.85 ; C17.2 12.25,21.1 ; C17.2 11.2,20.35 ; C38.1 55.45,61.3 ; 15.54,19.12 J2.8 ; J2.8 16.34,19.92 ; J2.8 16.34,18.32 ; J2.8 17.14,19.12 ; 61.74,74.52 J8.4 ; J8.4 60.64,73.42 ; J8.4 61.74,72.32
  BOTTOM w0.5: U4.3 17.13,80 ; U4.3 18.08,79.05 ; U4.3 19.03,80
  BOTTOM w0.8: U4.3 18.08,81.93 18.7,82.55 C42.2 L4.2
  vias: v1(1.9,53) v1(2.1,33.4) v1(2.3,43.7) v1(2.5,23.8) v1(3.1,58.8) v1(3.9,82.9) v1(5.9,76.9) v1(6.1,44.9) v1(6.6,23.8) v1(7.1,65.8) v1(7.4,33.4) v1(7.9,8.7) v1(8.8,40.3) v1(10.4,88.6) v1(10.8,27.3) v1(11.6,44.8) v1(11.9,53.6) v1(12.5,65.8) v1(13,72.9) v1(13.3,17.9) v1(13.8,3.8) v1(14.9,33.4) v1(17.7,73.1) v1(17.8,77.5) v1(21,89.2) v1(21,8.6) v1(21.7,58.9) v1(22.1,69.4) v1(22.7,77.8) v1(23.6,34.1) v1(24.3,83.3) v1(24.7,51.8) v1(26.5,74.9) v1(28.1,43) v1(28.8,3.9) v1(29,18.7) v1(29.1,55.9) v1(29.3,67) v1(29.3,63.9) v1(29.5,70.2) v1(31.2,47.2) v1(31.3,52) v1(31.9,38.1) v1(32.2,28.2) v1(33.2,77.6) v1(35.1,69.8) v1(35.5,59.5) v1(36.9,88.4) v1(37.1,42.9) v1(37.2,27.8) v1(38,8.7) v1(38.8,50.6) v1(39.9,64.9) v1(40.6,18.1) v1(41.5,26.8) v1(42.8,80.4) v1(43.1,35.9) v1(43.3,30.9) v1(44.3,59.4) v1(44.6,69.8) v1(45,26.5) v1(46.9,33.5) v1(46.9,3.4) v1(47.9,72.6) v1(48.6,88.4) v1(48.6,35.1) v1(48.6,32.2) v1(49.4,50.5) v1(49.7,65.7) v1(50.5,77.2) v1(50.7,80.3) v1(50.7,39.4) v1(51.2,33.3) v1(52.3,18.1) v1(54.4,40.4) v1(56,72.7) v1(56.5,76.3) v1(56.5,66) v1(56.6,63.5) v1(56.6,61.2) v1(56.6,57.5) v1(56.6,47.3) v1(56.7,80.2) v1(57.6,8.8) v1(58.9,21.7) v1(59.3,70.6) v1(59.7,88.4) v1(61,43.2) v1(61.2,67.4) v1(61.2,52.8) v1(61.7,48.3) v1(62.7,27.6) v1(63.9,80.1) v1(65.5,73.7) v1(66.6,3.6) v1(67.4,30) v1(68.1,70.2) v1(69.1,21.2) v1(69.2,42.2) v1(69.3,49.7) v1(69.7,34.8) v1(71.2,88.6) v1(71.2,66.7) v1(73.9,8.6) v1(74.6,61) v1(74.7,75.9) v1(75.2,44.9) v1(76.2,52.2) v1(76.5,67.9) v1(77.1,36.9) v1(77.1,29.2) v1(77.2,21.8) v1(78.2,79) v1(82.5,44) v3(3.5,88.5) v3(3.5,3.5) v3(83.5,88.5) v3(83.5,3.5)
GND_EXT: length 179.9
  TOP w0.8: 82.65,64.3 82.65,71.9 ; 82.65,64.3 82.65,56.6 ; 82.65,64.3 82.59,64.24 J5.5 ; 82.65,71.9 82.65,78.45 79.3,81.8 C18.2 62,81.8 61,82.8 31.2,82.8 30.24,81.84 J7.2 ; 82.65,71.9 82.61,71.86 J5.7 ; J5.3 82.63,56.62 82.65,56.6 ; 82.65,56.6 82.65,51.65 J5.1
  TOP w1: C40.2 13.6,79.2 13,79.8 U4.1 ; C41.2 19.6,60.3 18.7,59.4 8.5,59.4 6.2,61.7 D8.1 6.2,61.9 4,64.1 J9.2
  BOTTOM w0.5: D5.3 78.52,56.65 78.55,56.62 J5.3 ; D6.3 78.54,71.85 78.55,71.86 J5.7
  BOTTOM w0.8: U4.1 L4.1 13,84.3 15.2,86.5 25.5,86.5 30.24,81.76 J7.2
  BOTTOM w1: U4.1 9.4,76.4 9.4,71.6 6.99,69.19 J9.2
VDDA: length 6.8
  TOP w0.25: v1(27.7,58.1) 29.7,60.1 MCU1.22
  TOP w0.3: C34.2 v1(27.7,58.1)
  BOTTOM w0.3: C34.2 v1(27.7,58.1)
VDDA_1.8: length 28.6
  TOP w0.25: U1.7 38,33 v1(35.6,30.6)
  TOP w0.3: L1.2 v1(42.2,45.3) ; v1(35.6,30.6) C4.1
  BOTTOM w0.3: C4.1 v1(35.6,30.6) 42.2,37.2 v1(42.2,45.3)
VDDA_3.3: length 11.9
  TOP w0.25: 36.1,35 37.1,34 U1.5
  TOP w0.3: C6.1 v1(35.5,35.6) 36.1,35
  BOTTOM w0.3: v1(35.5,35.6) C6.1
  BOTTOM w0.5: L2.2 36.7,36.15 36.15,35.6 v1(35.5,35.6)
AI_C_0: length 28.8
  TOP w0.2: R24.2 62.5,32.1 66.7,27.9 68.4,27.9 J4.1
  BOTTOM w0.3: J4.1 78.65,16.3 77.65,17.3 D1.2
AI_C_0_CH_3: length 45.2
  TOP w0.2: R25.1 60.3,39.6 52.9,47 v1(52.9,52) ; MCU1.26 33.25,54.95 36.2,52 v1(36.3,52)
  BOTTOM w0.2: v1(36.3,52) v1(52.9,52) 52.9,50.45 53.95,49.4 C44.2
AI_C_1: length 20.9
  TOP w0.2: J4.3 76.4,23.92 68.22,32.1 R27.2
  BOTTOM w0.3: D2.2 76.08,24.88 79.05,24.88 J4.3
AI_C_1_CH_4: length 46.1
  TOP w0.2: MCU1.29 34.75,54.25 36.2,52.8 v1(36.3,52.8) ; R28.1 64.25,36.4 55.4,45.25 55.4,50.9 53.5,52.8 v1(52.9,52.8)
  BOTTOM w0.2: v1(36.3,52.8) v1(52.9,52.8) 53.6,52.8 54.7,51.7 C45.2
AI_C_2: length 21.2
  TOP w0.2: R32.2 68.84,39.1 76.4,31.54 J4.5
  BOTTOM w0.3: J4.5 79.05,32.49 76.09,32.49 D3.2
AI_C_2_CH_5: length 38.1
  TOP w0.2: R33.1 63.7,43.4 53.5,53.6 v1(52.9,53.6) ; MCU1.30 35.25,54.55 36.2,53.6 v1(36.3,53.6)
  BOTTOM w0.2: C46.2 54.5,53.6 v1(52.9,53.6) v1(36.3,53.6)
AI_C_3: length 20.8
  TOP w0.2: J4.7 76.4,39.16 69.66,45.9 R35.2
  BOTTOM w0.3: D4.2 76.02,40.12 79.05,40.12 J4.7
AI_C_3_CH_6: length 34.8
  TOP w0.2: v1(36.3,54.4) 35.75,54.95 MCU1.31 ; v1(52.9,54.4) 53.5,54.4 57.7,50.2 R36.1
  BOTTOM w0.2: v1(36.3,54.4) v1(52.9,54.4) 53.9,55.4 C47.2
AI_OUT_PWR: length 4.2
  TOP w0.6: J10.2 59.64,16.88 59.62,16.9 J3.3
AI_PWR_OUT: length 82
  TOP w0.6: 82.5,27.7 82.47,27.73 J4.4 ; 82.5,35.3 82.45,35.35 J4.6 ; 82.5,20.1 82.49,20.11 J4.2
  TOP w0.8: J3.2 62.16,16.84 62.9,16.1 74.6,16.1 77.1,13.6 81.4,13.6 82.5,14.7 82.5,40.47 J4.8
  BOTTOM w0.3: D4.1 79.03,42 J4.8 ; D2.1 78.97,26.7 J4.4 ; J4.6 78.95,34.3 D3.1 ; D1.1 77.74,19.2 78.65,20.11 J4.2
  BOTTOM w0.6: J3.2 62.16,19.5 62.1,19.56 C19.1
DI_IN_0: length 19.8
  BOTTOM w0.2: D5.2 67.1,55.7 63.3,59.5 R23.2
  BOTTOM w0.3: J5.2 77.11,55.7 D5.2
DI_IN_1: length 20
  BOTTOM w0.2: D5.1 72.1,57.6 68.7,61 64.3,61 63.3,62 R31.2
  BOTTOM w0.3: J5.4 77.17,57.6 D5.1
DI_IN_2: length 20.5
  BOTTOM w0.2: R39.2 63.3,65.2 64.2,66.1 66.7,66.1 71.5,70.9 D6.2
  BOTTOM w0.3: J5.6 77.15,70.9 D6.2
DI_IN_3: length 20.3
  BOTTOM w0.2: D6.1 68.4,72.8 63.3,67.7 R41.2
  BOTTOM w0.3: J5.8 77.13,72.8 D6.1
DI_TTL_0: length 14.6
  TOP w0.2: 52.8,59.4 53.6,60.2 56.5,60.2 56.93,59.77 U2.15 ; 52.8,59.4 51.6,60.6 MCU1.55 ; 52.8,59.4 C39.2 v1(53.6,59.1)
  BOTTOM w0.2: v1(53.6,59.1) C39.2
DI_TTL_1: length 14.1
  TOP w0.2: U2.13 58.09,62.31 58,62.4 53.6,62.4 52.8,61.6 C38.2 ; MCU1.56 52.6,61.1 C38.2 ; C38.2 v1(53.6,61.3)
  BOTTOM w0.2: C38.2 v1(53.6,61.3)
DI_TTL_2: length 15
  TOP w0.2: C37.2 52.8,63.8 53.6,64.6 56.5,64.6 56.75,64.85 U2.11 ; C37.2 v1(53.6,63.5) ; C37.2 52.8,63.2 51.2,61.6 MCU1.57
  BOTTOM w0.2: v1(53.6,63.5) C37.2
DI_TTL_3: length 15.9
  TOP w0.2: C36.2 52.8,66 54.2,67.4 57.49,67.4 57.5,67.39 U2.9 ; C36.2 v1(53.6,65.7) ; C36.2 52.8,65.4 49.5,62.1 MCU1.58
  BOTTOM w0.2: C36.2 v1(53.6,65.7)
ETH1_LED0: length 50.8
  TOP w0.2: U1.44 44.75,39.95 35.5,49.2 30.7,49.2 24.5,55.4 R17.2 v1(5.7,56.9)
  BOTTOM w0.2: R17.2 v1(5.7,56.9)
ETH1_LED1: length 46.5
  TOP w0.2: R16.2 24.1,56.4 30.9,49.6 35.7,49.6 45.25,40.05 U1.43
ETH2_LED0: length 12.4
  TOP w0.2: U1.46 43.75,39.65 38.2,45.2 R21.2
ETH2_LED1: length 13.9
  TOP w0.2: R20.2 36.85,47.2 44.25,39.8 U1.45
ETH_CRS_DV: length 42.3
  TOP w0.2: MCU1.32 36.25,55.35 43.3,48.3 46.9,48.3 53.6,41.6 53.6,28.9 53.2,28.5 51.38,28.5 49.8,30.07 U1.25
ETH_MDC: length 40.6
  TOP w0.2: MCU1.16 32.9,63.1 33.4,62.6 33.4,58.6 32.4,57.6 32.4,54.95 39.45,47.9 46.73,47.9 49.8,44.83 U1.36
ETH_MDIO: length 34.9
  TOP w0.2: U1.37 48.25,45.25 46.4,47.1 39.93,47.1 39,47.1 31.5,54.6 31.5,54.83 31.5,54.84 31.5,55.16 31.5,55.17 MCU1.25 v1(30.2,58.6)
  BOTTOM w0.2: v1(30.2,58.6) MCU1.25
ETH_REF_CLK: length 51.4
  TOP w0.2: R50.1 R15.1 54.5,28.75 53.85,28.1 51,28.1 47.9,31.2 47.9,35.9 48.7,36.7 48.7,45.37 46.57,47.5 39.77,47.5 39.77,47.5 39.44,47.5 39.43,47.5 39.2,47.5 31.9,54.8 31.9,57.83 32.5,58.42 32.5,58.9 32.3,59.1 MCU1.24
ETH_RXD0: length 34
  TOP w0.2: R9.2 55.25,34 56,34.75 56,40 47.3,48.7 47.06,48.7 43.7,48.7 36.75,55.65 MCU1.33
ETH_RXD1: length 36.2
  TOP w0.2: R11.2 55.25,32 56.5,33.25 56.5,40.3 47.5,49.3 43.9,49.3 37.25,55.95 MCU1.34
ETH_TX_EN: length 45.4
  TOP w0.2: R49.2 44.3,51.4 45.6,50.1 47.5,50.1 57,40.6 57,28.9 55.8,27.7 50.8,27.7 47.6,30.9 44.8,30.9 44.25,30.35 U1.16
ETH_TXD0: length 46.3
  TOP w0.2: R46.2 51.1,47.3 57.5,40.9 57.5,31.93 58.9,30.52 58.9,28.8 57,26.9 47.1,26.9 46.25,27.75 U1.20
ETH_TXD1: length 50.3
  TOP w0.2: R45.2 51.1,58.8 51.9,58 51.9,47.27 58,41.17 58,32.1 59.4,30.7 59.4,28.5 57.4,26.5 46.9,26.5 45.75,27.65 U1.19
FLASH_CS: length 11.5
  TOP w0.2: MCU1.77 44.75,73.25 46.1,74.6 51.7,74.6 53.1,76 U3.1
FLASH_MISO: length 18.6
  TOP w0.2: MCU1.79 43.75,74.05 43.1,74.7 43.1,78.4 43.9,79.2 51.72,79.2 53.65,77.27 U3.2
FLASH_MOSI: length 11.7
  TOP w0.2: U3.5 43.91,79.81 42.7,78.6 42.7,74.5 43.25,73.95 MCU1.80
FLASH_SCK: length 10.2
  TOP w0.2: MCU1.78 44.25,74.15 43.5,74.9 43.5,78.2 43.84,78.54 U3.6
RELAY_0: length 8.6
  TOP w0.2: J7.6 40.4,76.17 42.75,73.82 MCU1.81
RELAY_1: length 9.5
  TOP w0.2: J7.5 37.86,78.14 42.25,73.75 MCU1.82
RELAY_2: length 10.3
  TOP w0.2: J7.4 41.75,73.57 MCU1.83
RELAY_3: length 12.2
  TOP w0.2: J7.3 33.56,79.22 33.58,79.22 34.8,78 36.53,78 41.25,73.28 MCU1.84
RST: length 59.2
  TOP w0.2: MCU1.14 v1(33.1,64.1) 33.1,70.9 31.9,72.1 30.3,72.1 28.7,73.7 28.7,76.6 31.5,79.4 31.5,80.6 32.6,81.7 58.54,81.7 J8.6 64.9,78.5 R44.2
  BOTTOM w0.2: MCU1.14 v1(33.1,64.1)
RXM1: length 33.2
  TOP w0.2: U1.1 40.2,36 30.4,45.8 16.65,45.8 16.24,46.21 J1.2
  BOTTOM w0.2: J1.2 17.28,45.2 R3.2
RXM2: length 31.2
  TOP w0.2: J2.2 16.68,26.4 33.5,26.4 39.5,32.4 40.2,32.4 40.3,32.5 U1.8
  BOTTOM w0.2: R10.2 19.36,26.74 J2.2
RXP1: length 38.6
  TOP w0.2: U1.2 40.13,35.5 30.23,45.4 15.8,45.4 J1.1
  BOTTOM w0.2: R5.2 J1.1
RXP2: length 37
  TOP w0.2: J2.1 15.86,25.94 33.61,25.94 39.67,32 U1.9
  BOTTOM w0.2: R12.2 14.4,28.6 J2.1
SWCLK: length 15.7
  TOP w0.2: J8.2 57.34,74.1 46.55,74.1 45.25,72.8 MCU1.76
SWDIO: length 14.6
  TOP w0.2: J8.3 54.18,68.4 49.3,68.4 48.6,69.1 MCU1.72
SWO: length 24.2
  TOP w0.2: MCU1.89 38.75,74.35 v1(38.8,74.4)
  BOTTOM w0.2: J8.1 42.9,78.5 v1(38.8,74.4)
TXM1: length 31.3
  TOP w0.2: J1.6 16.7,40.7 32.8,40.7 38.5,35 U1.3
  BOTTOM w0.2: R6.2 17.1,40.6 17.09,40.59 16.81,40.59 J1.6
TXM2: length 34.3
  TOP w0.2: J2.6 19.38,24.7 36.57,24.7 42.1,30.23 42.1,30.8 41.9,31 U1.11
  BOTTOM w0.2: J2.6 19.76,21.66 R13.2
TXP1: length 40.3
  TOP w0.2: U1.4 40.1,34.5 40,34.6 38.3,34.6 32.6,40.3 15.8,40.3 15.2,40.9 15.2,43.46 J1.3
  BOTTOM w0.2: J1.3 16.14,44.96 18.2,42.9 R7.2
TXP2: length 36.9
  TOP w0.2: J2.3 14.16,25.1 36.4,25.1 41.2,29.9 U1.12
  BOTTOM w0.2: J2.3 18.64,25.46 19.8,24.3 R14.2
VREF: length 6.2
  TOP w0.25: MCU1.21 v1(27.7,60.6) 26.8,60.6 C33.2
  BOTTOM w0.25: C33.2 26.8,60.6 v1(27.7,60.6)
N3761335: length 4.4
  TOP w0.2: R25.2 R24.1 R26.2
N3761583: length 4.4
  TOP w0.2: R28.2 R27.1 R29.2
N3788396: length 3.4
  TOP w0.2: R42.2 36.25,75.65 MCU1.94
N3788604: length 3
  TOP w0.2: MCU1.73 C29.2
N3788651: length 4.1
  TOP w0.2: MCU1.49 44.75,55.95 46,54.7 C35.2
N3789744: length 4.4
  TOP w0.2: R33.2 R32.1 R34.2
N3789822: length 4.4
  TOP w0.2: R36.2 R35.1 R37.2
N3796397: length 2.6
  TOP w0.2: MCU1.37 v1(38.75,55.55)
  BOTTOM w0.2: R48.1 38.75,56.75 v1(38.75,55.55)
N3796963: length 3.7
  TOP w0.2: R49.1 44.25,53.55 MCU1.48
N4537878: length 2.8
  TOP w0.3: U2.2 65.23,59.8 v1(66.6,59.8)
  BOTTOM w0.3: R23.1 v1(66.6,59.8)
N4538644: length 2.8
  TOP w0.3: U2.4 v1(66.6,62.31)
  BOTTOM w0.3: R31.1 65.21,62.31 v1(66.6,62.31)
N4538843: length 2.8
  TOP w0.3: U2.8 v1(66.59,67.39)
  BOTTOM w0.3: v1(66.59,67.39) 65.21,67.39 R41.1
N4539052: length 2.8
  TOP w0.3: v1(66.6,64.9) 65.25,64.9 U2.6
  BOTTOM w0.3: R39.1 v1(66.6,64.9)
N4547709: length 3.1
  TOP w0.2: R46.1 49.2,57.2 47.8,58.6 MCU1.51
N4547713: length 2.2
  TOP w0.2: R45.1 MCU1.52
N4548481: length 7.4
  TOP w0.25: U1.6 37.5,33.5 37.1,33.1 R8.2
N4551709: length 9.8
  TOP w0.2: C15.1 Y1.3 42.3,22.5 43.25,23.45 U1.14
N4551769: length 8
  TOP w0.2: U1.15 43.75,24.75 44.3,24.2 Y1.1 C16.1
N4553149: length 3.1
  TOP w0.2: U1.24 48.25,28.38 v1(48.67,27.95)
  BOTTOM w0.2: v1(48.67,27.95) 48.67,26.1 48.7,26.07 R19.2
N4554278: length 5.5
  TOP w0.2: v1(51.6,38.7) 51.2,38.3 51.2,36 50.7,35.5 U1.35
  BOTTOM w0.2: v1(51.6,38.7) R4.1
N4554434: length 5.3
  TOP w0.2: U1.39 47.25,38.75 v1(47.6,39.1)
  BOTTOM w0.2: v1(47.6,39.1) 48.6,39.1 50.2,40.7 R2.1
N4554520: length 4.8
  BOTTOM w0.2: R3.1 R5.1 C10.2
N4554841: length 5.2
  BOTTOM w0.2: C11.2 23.9,41.5 23,40.6 R6.1 R7.1
N4555040: length 4.8
  BOTTOM w0.2: R10.1 R12.1 C12.2
N4555226: length 4.8
  BOTTOM w0.2: R14.1 R13.1 C13.2
N4558201: length 5.2
  TOP w0.2: U1.47 43.25,38.45 42.1,39.6 v1(41.4,39.6) C9.2
  BOTTOM w0.2: C9.2 v1(41.4,39.6)
N4585606: length 3.5
  TOP w0.2: R15.2 52.6,30.1 51.7,31 U1.26
N4585853: length 3.6
  TOP w0.2: U1.29 51.4,32.5 52.6,33.7 R9.1
N4585857: length 2.8
  TOP w0.2: U1.28 R11.1
N4589372: length 8.8
  TOP w0.2: J1.10 3.8,48.49 R17.1
N4589863: length 18
  TOP w0.2: R16.1 7.7,54.5 4.3,51.1 4.3,40.83 J1.11
N4590672: length 54.6
  TOP w0.2: J2.11 4.5,21.43 4.5,39.63 13.27,48.4 32.9,48.4 33.8,47.5 R20.1
N4590712: length 50.7
  TOP w0.2: R21.1 33.8,45.5 34.7,46.4 34.7,48.1 34,48.8 13,48.8 3.7,39.5 3.7,28.8 J2.10
N4616330: length 13.3
  TOP w0.2: R50.2 58,28.7 56.6,27.3 48.2,27.3 47.75,27.75 U1.23
N4623177: length 5.9
  TOP w1: J9.1 D7.2
N4623416: length 13.1
  TOP w1: D7.1 D8.2 F2.2
N4630323: length 8.8
  TOP w1: L3.2 C40.1 15.5,78.61 15.54,78.65 U4.2

## Copper pours and planes (outline as drawn; the poured copper is in the pictures)
GND on TOP: 0.5,0.5 0.5,91.5 86.5,91.5 86.5,0.5 ; 18 cut-outs
GND on BOTTOM: 0.5,0.5 0.5,91.5 86.5,91.5 86.5,0.5 ; 4 cut-outs

## Text on the board
Ref Des/Silkscreen Bottom: v1.2 | SH-Z-002 | 20180905 | SWO | SWCLK | SWDIO | 3.3 | 24 | RST | GND | VCC | DI4 | AIP | DI3 | DI1 | AI4 | AI1 | DI2 | AI3 | AI2 | DO4 | DO3 | DO2 | DO1
Ref Des/Silkscreen Top: 3.3V | SWCLK | SWDIO | SWO | 24V | RST | VCC | GND | AIP | AI4 | AI3 | AI2 | AI1 | DO1 | DO2 | DO3 | DO4 | DI4 | DI2 | DI3 | DI1
NCLEGEND-1-2: FIGURE | FINISHED_SIZE | 0.3 | 0.5 | 0.8 | 1.0 | 1.2 | 1.6 | 3.0 | 3.2 | TOOL_SIZE | - | DRILL CHART: TOP to BOTTOM | ALL UNITS ARE IN MILLIMETERS | TOLERANCE_DRILL | +0.0/-0.0 | TOLERANCE_TRAVEL | PLATED | NON-PLATED | QTY | 155 | 2 | 28 | 18 | 14 | 1 | 4
